# Altium PCB shutter.PcbDoc
Units mm, origin at the board's own origin, x right, y up, seen from the top; angles counter-clockwise.
Board outline 95 x 82 mm, 2 copper layers (Top Layer, Bottom Layer); 49 components, 31 nets, 141 pads, 85 vias.
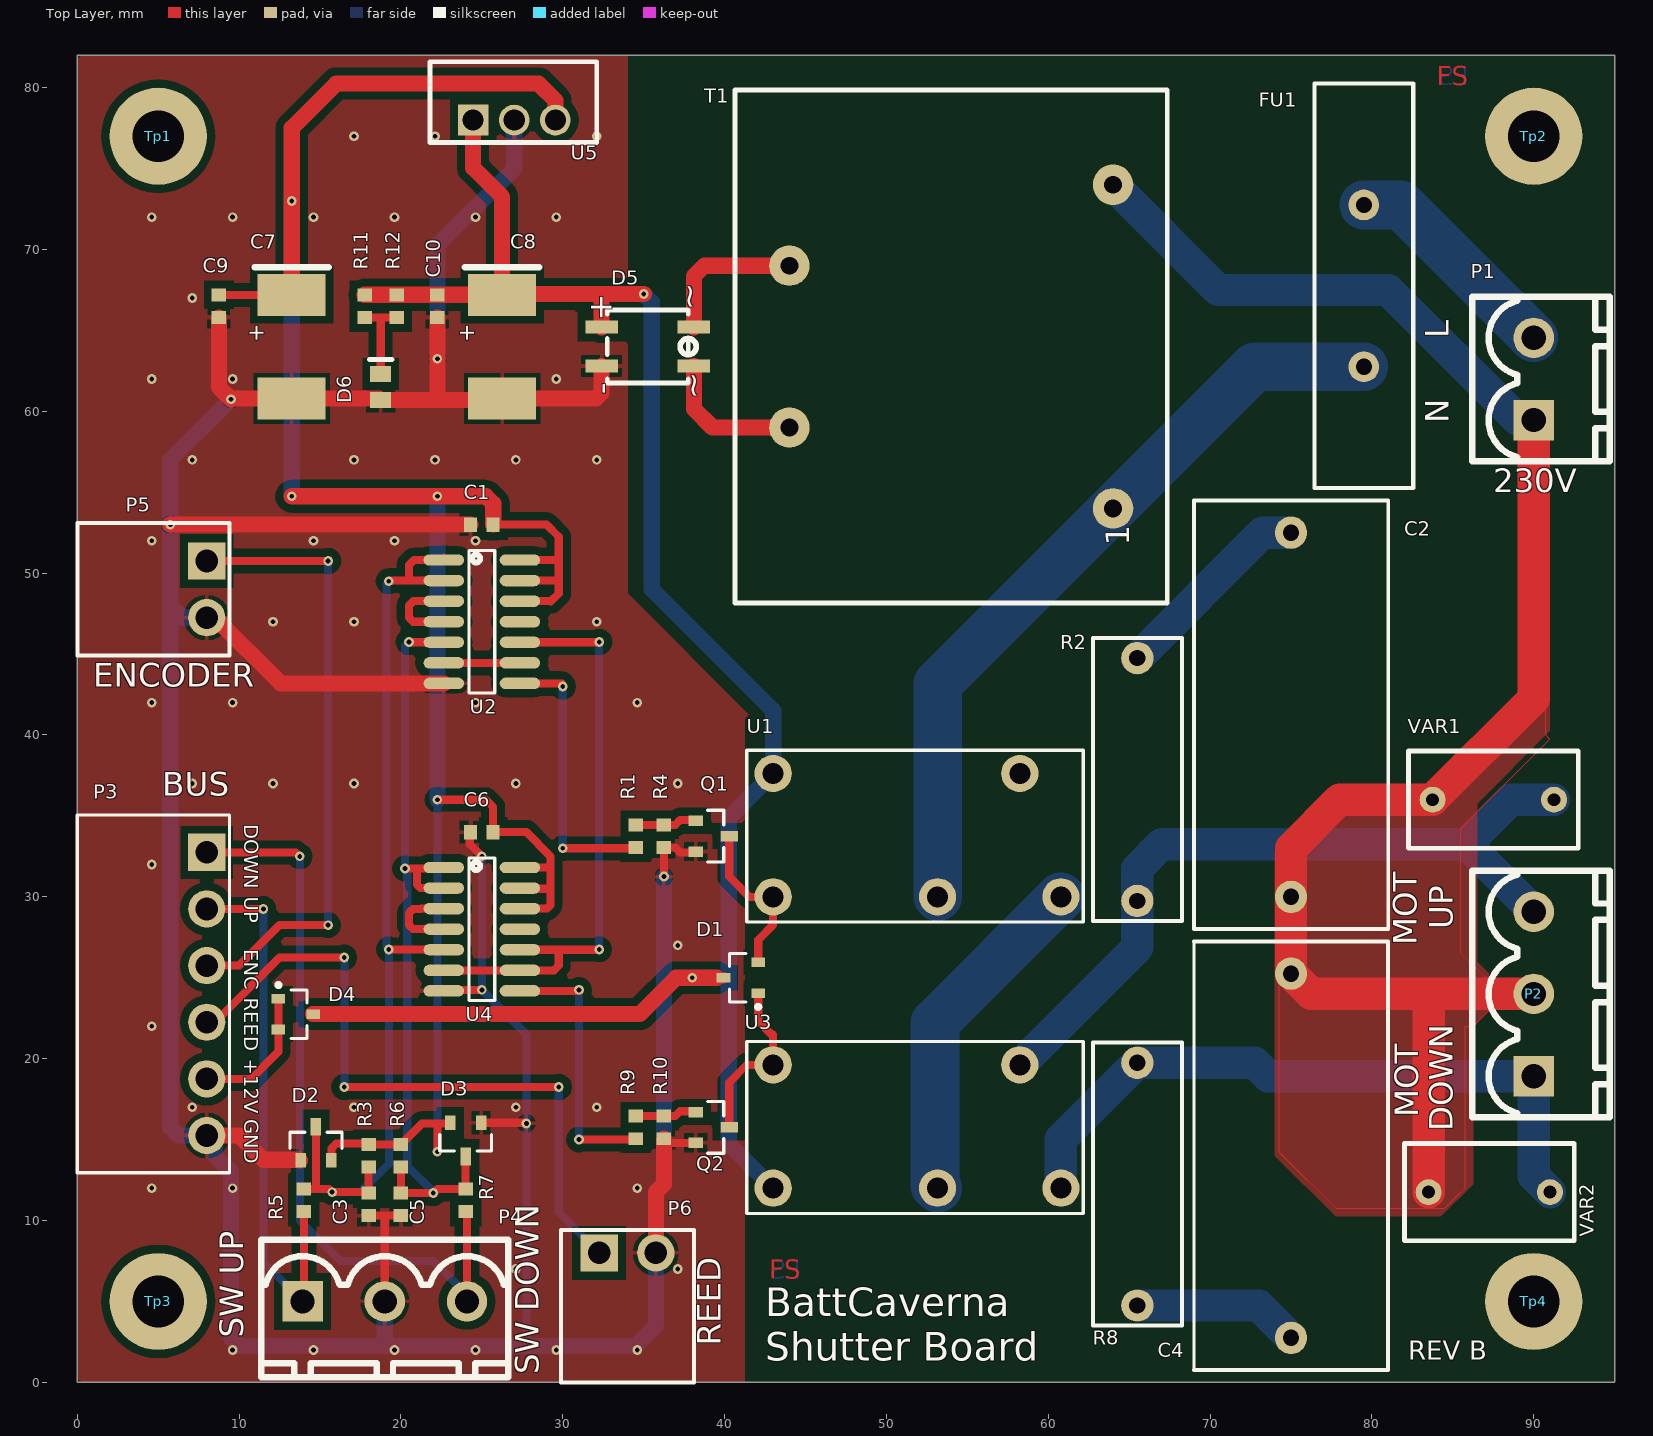
[diagram p0: Top Layer view]
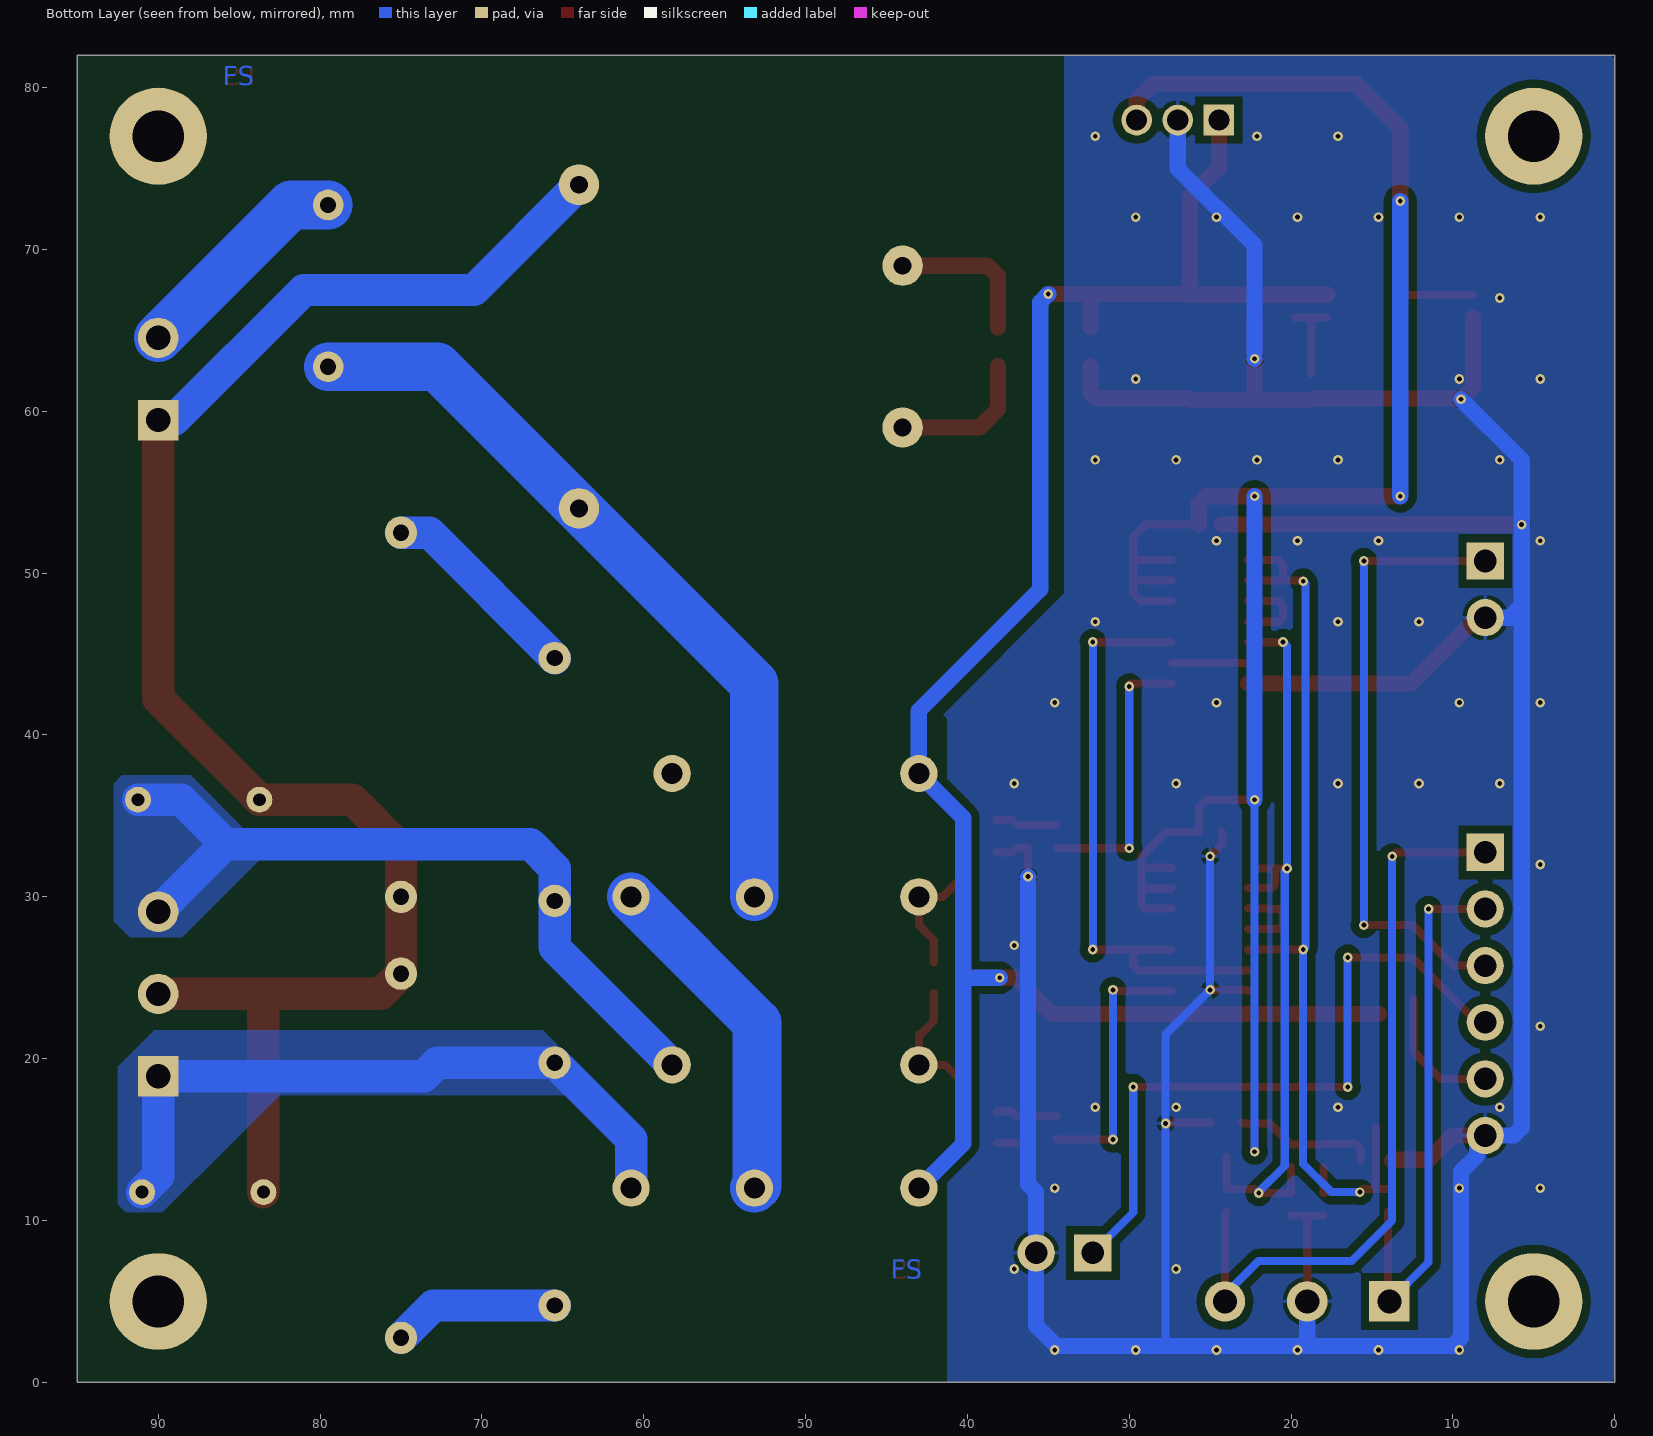
[diagram p1: Bottom Layer view, seen from below]
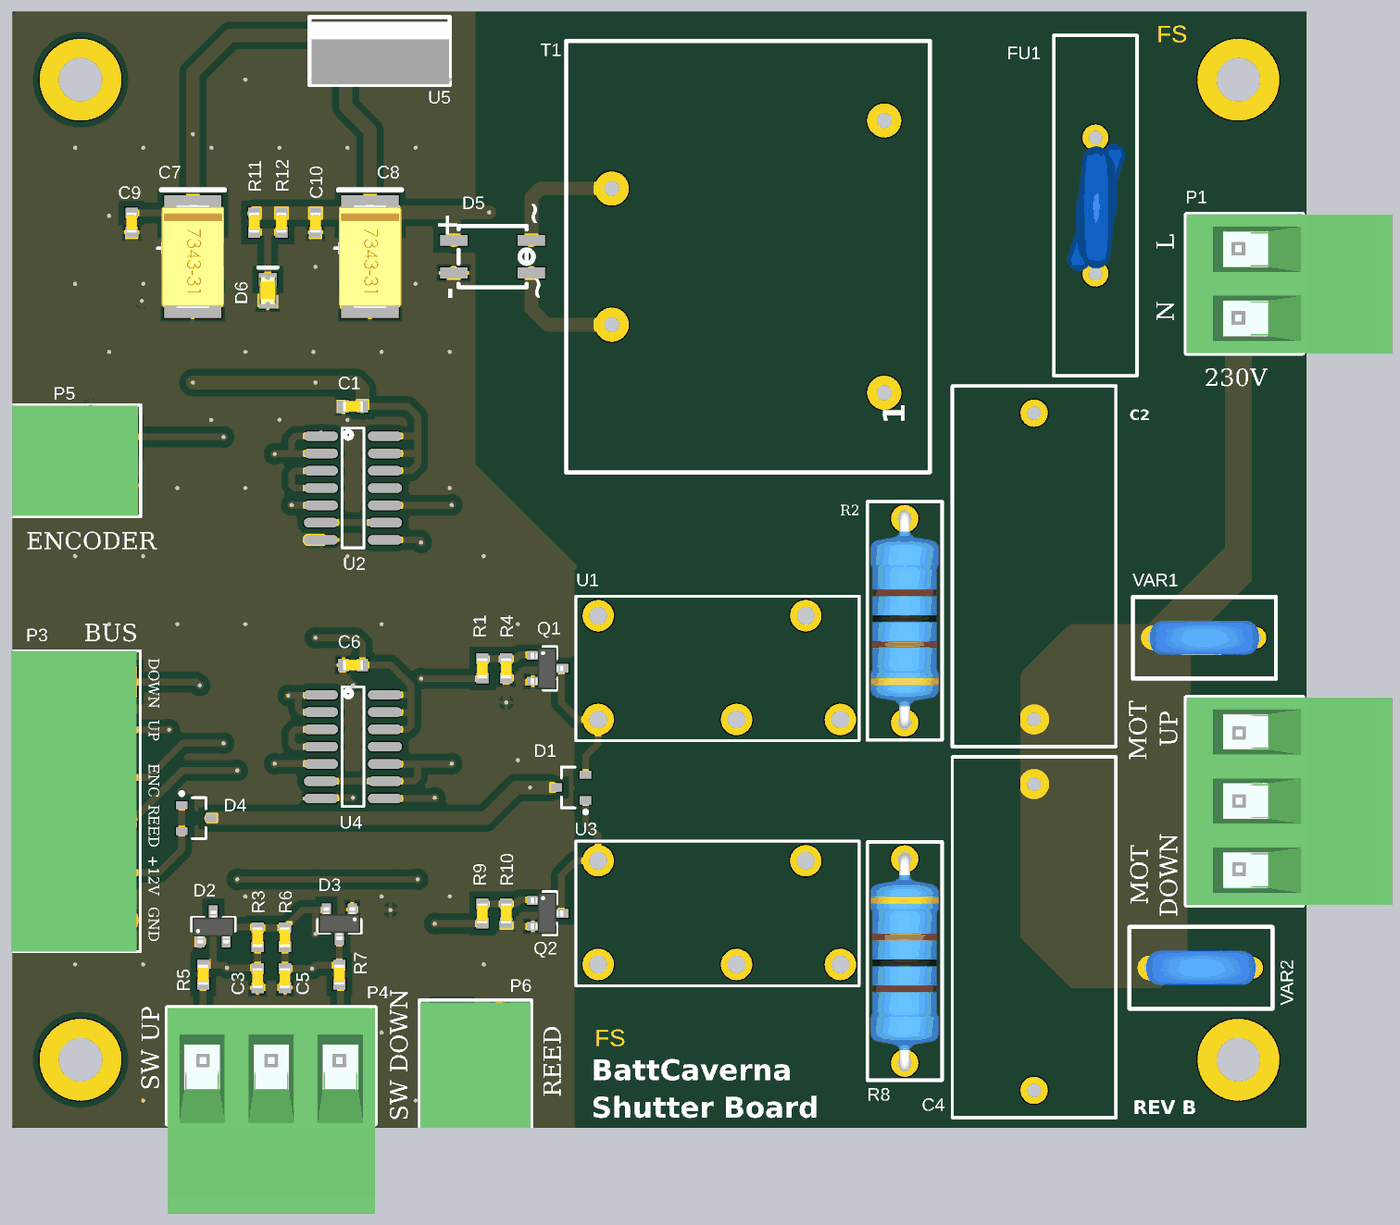
[diagram p2: 3D render of the assembled board from above, using the file's embedded part models]

## Layer stack, top to bottom
Top Solder: solder mask 0.0102, Solder Resist, Dk 3.5
Top Layer: signal copper 0.0356
Dielectric 1: dielectric 0.32, FR-4, Dk 4.8
Bottom Layer: signal copper 0.0356
Bottom Solder: solder mask 0.0102, Solder Resist, Dk 3.5

## Board outline
0,0 95,0 95,82 0,82

## Design rules (kind name [scope] priority, off if disabled: settings)
Clearance [All] p1: gap=0.254 except(0.5: Arc-Poly Track-Poly SMDPad-Poly THPad-Poly Via-Poly Fill-Poly Poly-Poly)
Height [All] p1: minheight=0 maxheight=30 prefheight=12.7
HoleSize [All] p1: absolutevalues=TRUE maxlimit=5 minlimit=0.025 maxpercent=80.000 minpercent=20.000
PolygonConnect PolygonConnect_1 [InNet('NetC2_1')] p1: connectstyle=Direct reliefconductorwidth=0.254 reliefentries=4 polygonreliefangle="90 Angle" airgapwidth=0.254
PolygonConnect PolygonConnect_2 [InNet('MOT_UP')] p2: connectstyle=Direct reliefconductorwidth=0.254 reliefentries=4 polygonreliefangle="90 Angle" airgapwidth=0.254
PolygonConnect PolygonConnect_3 [InNet('MOT_DOWN')] p3: connectstyle=Direct reliefconductorwidth=0.254 reliefentries=4 polygonreliefangle="90 Angle" airgapwidth=0.254
PolygonConnect [All] p4: connectstyle=Relief reliefconductorwidth=0.254 reliefentries=4 polygonreliefangle="90 Angle" airgapwidth=0.254
RoutingVias [All] p1: holewidth=0.711 width=1.27 viastyle="Through Hole" minholewidth=0.711 minwidth=1.27 maxholewidth=0.711 maxwidth=1.27
SilkToSilkClearance [All] p1: silktosilkclearance=0
SilkToSolderMaskClearance [IsPad] p1: minsilkscreentomaskgap=0.12 clearancetoexposedcopper=TRUE
SolderMaskExpansion [All] p1: expansion=0.102
Width [All] p1: maxlimit=5 minlimit=0.254 preferedwidth=0.5 minimp=50.000000 maximp=50.000000 favimp=50.000000
26 further rules are at their usual default settings.

## Components (designator, comment, footprint, x,y, rotation, side; value= is the part's Value field where it differs from the comment)
C1 "100nF" 0603_[1608] 25,53 r0 top
C2 "1.5uF X2 250VAC" RADIAL-22MM 75,41.25 r90 top
C3 "100nF" 0603_[1608] 18,11 r90 top
C4 "1.5uF X2 250VAC" RADIAL-22MM 75,14 r270 top
C5 "100nF" 0603_[1608] 20,11 r90 top
C6 "100nF" 0603_[1608] 25,34 r0 top
C7 "100uF" [7343]_CAP_TAN 13.25,64 r270 top
C8 "100uF" [7343]_CAP_TAN 26.25,64 r270 top
C9 "100nF" 0603_[1608] 8.75,66.5 r90 top
C10 "100nF" 0603_[1608] 22.25,66.5 r90 top
D1 "BAV70" SOT-23_L 41,25 r180 top
D2 "BAV99" SOT-23 14.75,14.75 r90 top
D3 "BAV99" SOT-23 24,15 r270 top
D4 "BAV70" SOT-23_L 13.5,22.75 r0 top
D5 "MBS4" Diode_bridge_smd 35.25,64 r270 top
D6 "PWR_ON" 0805_[2012]_LED 18.75,61.5 r90 top
FU1 "LVR200S" RADIAL-10mm-25x6mm 79.5,67.75 r90 top
P1 "230V" TBLOCK_1X2_5.08MM_THD 90,62 r90 top
P2 "MOTOR" TBLOCK_1X3_5.08MM_THD 90,24 r90 top
P3 "BUS" TBLOCK_1X6_3.5MM_HOR_THD 8,24 r270 top
P4 "SWITCHES" TBLOCK_1X3_5.08MM_THD 19,5 r0 top
P5 "ENCODER" TBLOCK_1X2_3.5MM_HOR_THD 8,49 r270 top
P6 "REED" TBLOCK_1X2_3.5MM_HOR_THD 34,8 r0 top
Q1 "BC817" SOT-23 39.25,33.75 r0 top
Q2 "BC817" SOT-23 39.25,15.75 r0 top
R1 "10K" 0603_[1608] 34.5,33.75 r90 top
R2 "220 1W" "AXIAL 15mm" 65.5,37.25 r270 top
R3 "10K" 0603_[1608] 18,14 r90 top
R4 "4K7" 0603_[1608] 36.25,33.75 r90 top
R5 "330" 0603_[1608] 14,11.25 r270 top
R6 "10K" 0603_[1608] 20,14 r90 top
R7 "330" 0603_[1608] 24,11.25 r270 top
R8 "220 1W" "AXIAL 15mm" 65.5,12.25 r90 top
R9 "10K" 0603_[1608] 34.5,15.75 r90 top
R10 "4K7" 0603_[1608] 36.25,15.75 r90 top
R11 "3K3" 0603_[1608] 17.75,66.5 r90 top
R12 "3K3" 0603_[1608] 19.75,66.5 r90 top
T1 "MYRRA 44122" Transformer_26.7x31.7 54,64 r90 top
Tp1 "" Hole_M3x6mm#1 0,77 r180 top
Tp2 "" Hole_M3x6mm#2 90,77 r180 top
Tp3 "" Hole_M3x6mm#3 3,5 r180 top
Tp4 "" Hole_M3x6mm#2 90,5 r180 top
U1 "G5Q-1 DC12V" RELAYS_SPCO_THD_20x10mirror 43,30 r0 top
U2 "74HC132" SOIC14 25,47 r0 top
U3 "G5Q-1 DC12V" RELAYS_SPCO_THD_20x10mirror 43,12 r0 top
U4 "74HC132" SOIC14 25,28 r0 top
U5 "LM7805-3pin" TO-220_VERTICAL 27,78 r270 top
VAR1 "10D471K" CAP_DISK_7.5MM_THD 87.5,36 r0 top
VAR2 "10D471K" CAP_DISK_7.5MM_THD 87.25,11.75 r0 top

## Footprints (in the part's own frame and the unit in brackets; to place one, negate y for a bottom-side part, rotate by r counter-clockwise, add the part's x,y. Pads: shape width x height; smd on the part's side, far side on the other; paste and mask are expansions set on the pad)
0603_[1608] [mm] "Chip Capacitor, Body 1.6x0.8mm, IPC High Density"
  rect 0.8x0.9 smd: 1(-0.7,0) 2(0.7,0)
  body extent -0.75,-0.4 0.75,0.4, height 0.67
0805_[2012]_LED [mm] "SMD led 0805 size"
  rect 1x1.3 smd: 1(-0.8,0) 2(0.8,0)
  silkscreen extent 1.7,-0.7 1.7,0.7, body extent -1.01,-0.63 1.01,0.62, height 1.1
[7343]_CAP_TAN [mm] "Capacitor, SM Tantalum; Body 7.3 x 4.3 mm (LxW typ)"
  rect 2.6x4.2 smd: 1(-3.2,0) 2(3.2,0)
  silkscreen extent -4.9,-2.3 -4.9,2.3, body extent -3.8,-2.3 3.8,2.3, height 3.1
"AXIAL 15mm" [mm]
  round 2 hole 1: 1(-7.5,0) 2(7.5,0)
  silkscreen extent -8.75,-2.75 8.75,2.75, body extent -8.15,-2.49 7.89,2.49, height 8
CAP_DISK_7.5MM_THD [mm] "Capacitor X/Y class 7.5mm lead spacing, 5mm tickness, radius 16mm"
  round 1.6 hole 0.8: 1(-3.75,0) 2(3.75,0)
  silkscreen extent -5.25,-3 5.25,3, body extent -4,-1.26 4,1.25, height 11
Diode_bridge_smd [mm] "Full diode bridge smd"
  rect 0.8x2 smd: +(-1.2,-2.85) -(1.2,-2.85) AC1(-1.2,2.85) AC2(1.2,2.85)
  silkscreen extent -2.25,-2.5 2.25,3, body extent -2.25,-2.5 2.25,2.5, height 3
Hole_M3x6mm#1 [mm]
  round 6 hole 3.2 paste-10: 1(-5,0)
Hole_M3x6mm#2 [mm]
  round 6 hole 3.2 paste-10: 1(0,0)
Hole_M3x6mm#3 [mm]
  round 6 hole 3.2 paste-10: 1(-2,0)
RADIAL-10mm-25x6mm [mm]
  round 1.9 hole 1: 1(-5,0) 2(5,0)
  silkscreen extent -12.5,-3.05 12.5,3.05, body extent -4.79,-2.19 4.51,2.05, height 11.6
RADIAL-22MM [mm]
  round 2 hole 1: 1(-11.25,0) 2(11.25,0)
  silkscreen extent -13.25,-6 13.25,6, body extent -13.25,-6 13.25,6, height 26
RELAYS_SPCO_THD_20x10mirror [mm]
  round 2.3 hole 1.3: COM(10.16,0) NC(15.24,7.62) NO(17.78,0) T1(0,7.62) T2(0,0)
  silkscreen extent -1.64,-1.56 19.16,9.06, body extent -1.27,-1.27 19.05,8.89, height 16
SOIC14 [mm] "SOIC, 14-Leads, Body 8.7x3.9mm, Pitch 1.27mm, IPC High Density"
  oval 2.5x0.7 smd: 1(-2.35,3.81) 2(-2.35,2.54) 3(-2.35,1.27) 4(-2.35,0) 5(-2.35,-1.27) 6(-2.35,-2.54) 7(-2.35,-3.81) 8(2.35,-3.81) 9(2.35,-2.54) 10(2.35,-1.27) 11(2.35,0) 12(2.35,1.27) 13(2.35,2.54) 14(2.35,3.81)
  silkscreen extent -0.8,-4.4 0.8,4.4, body extent -2,-4.38 2,4.38, height 1.75
SOT-23 [mm] "SOT23, 3-Leads, Body 2.9x1.3mm, Pitch 0.95mm, Lead Span 2.5mm, IPC High Density"
  rect 0.9x0.65 smd: 1(-1.038,0.95) 2(-1.038,-0.95)
  rect 1.1x0.65 smd: 3(1.038,0)
  silkscreen extent -0.3,-1.6 0.7,1.6, body extent -1.2,-1.52 1.2,1.52, height 1.22
SOT-23_L [mm] "SOT23, 3-Leads, Body 2.9x1.3mm, Pitch 0.95mm, Lead Span 2.5mm, IPC High Density"
  rect 0.85x0.6 smd: 1(-1.075,0.95) 2(-1.075,-0.95) 3(1.075,0)
  silkscreen extent -1.2,-1.5 0.7,1.92, body extent -0.7,-1.5 0.7,1.5, height 1.1
TBLOCK_1X2_3.5MM_HOR_THD [mm] "3,50mm - PCB Horizontal - 02p"
  rect 2.3x2.3 hole 1.4: 1(-1.75,0)
  round 2.3 hole 1.4: 2(1.75,0)
  silkscreen extent -4.1,-8 4.1,1.4, body extent -4.05,-8 4.05,1.2, height 7.21
TBLOCK_1X2_5.08MM_THD [mm] "Terminal block 5.08mm 2p"
  rect 2.5x2.5 hole 1.5: 1(-2.54,0)
  round 2.5 hole 1.5: 2(2.54,0)
  silkscreen extent -5.08,-4.69 5.08,3.81, body extent -5.08,-11.28 5.12,3.82, height 18.45
TBLOCK_1X3_5.08MM_THD [mm] "Terminal block 5.08mm 3p"
  rect 2.5x2.5 hole 1.5: 1(-5.08,0)
  round 2.5 hole 1.5: 2(0,0) 3(5.08,0)
  silkscreen extent -7.62,-4.69 7.62,3.81, body extent -7.62,-11.28 7.62,3.82, height 18.45
TBLOCK_1X6_3.5MM_HOR_THD [mm] "3,50mm - PCB Horizontal - 06p"
  rect 2.3x2.3 hole 1.4: 1(-8.75,0)
  round 2.3 hole 1.4: 2(-5.25,0) 3(-1.75,0) 4(1.75,0) 5(5.25,0) 6(8.75,0)
  silkscreen extent -11.05,-8 11.05,1.4, body extent -11.05,-8.1 11.05,1.1, height 7.21
TO-220_VERTICAL [mm]
  rect 1.9x1.9 hole 1.3: 1(0,-2.54)
  round 1.9 hole 1.3: 2(0,0) 3(0,2.54)
  silkscreen extent -3.6,-5.2 1.4,5.1, body extent -3.25,-5.08 1.32,5.08, height 19.54
Transformer_26.7x31.7 [mm]
  round 2.5 hole 1.1: 1(-10,-10) 5(10,-10) 7(5,10) 9(-5,10)
  silkscreen extent -15.85,-13.35 15.85,13.35, body extent -15.87,-13.37 15.83,13.33, height 26.8

## Part data
C1 C2 C4 C6 C9 C10: library part Cap, "Ceramic X7R 50V"
C3 C5: library part Cap, "Ceramic X5R 6.3V, 10V"
C7 C8: library part "Cap Pol1", "Tantalum 25V T491X107K025AT"
D1 D2 D3 D4: "SOT23"
D5: library part Diode_bridge2
D6: library part LED, "Multicolor LED"
FU1: library part FuseAutoReset, "Fuse autoreset"
P1 P5 P6: library part "Header 2", "Header, 2-Pin"
P2 P4: library part "Header 3", "Header, 3-Pin"
P3: library part "Header 6", "Header, 6-Pin"
Q1 Q2: "NPN Transistor"
R1 R2 R3 R4 R5 R6 R7 R8 R9 R10 R11 R12: library part Res1, "Resistor"
T1: library part transformer_myrra_44087
Tp1 Tp2 Tp3 Tp4: library part Test_point
U1 U3: library part "Relay SPCO"
U2 U4: library part 74HC00, "4 NAND ports"
VAR1 VAR2: library part VARISTOR

## Via types
v1: diameter 0.6, hole 0.3, Top Layer to Bottom Layer, tented both sides, 85 vias

## Nets (pads, with @x,y where several pads share a name; then routed paths per layer and width w, separated by ;. In a path a pad name is that pad's centre, name@x,y a point inside that pad or via, vN(x,y) a via of type N, cw(c..) or ccw(c..) an arc to the next point about the centre after c; other vN are vias at no path point)
+12V: C8.1 C10.2 D1.3 D4.3 D5.+ R11.2 R12.2 U1.T1 U3.T2 U5.1 | length 120.3
  Top Layer w0.7: D1.3@39.5,25 D1.3
  Top Layer w1: D4.3 34.75,22.75 37,25 v1(38,25) D1.3@39.5,25 ; R11.2 C10.2 C8.1 C8.1@26.25,67.25 ; U5.1 24.46,75.04 26.25,73.25 C8.1@26.25,67.25 ; D5.+ 32.4,67.15 32.5,67.25 ; v1(35,67.25) 32.5,67.25 ; C8.1@26.25,67.25 32.5,67.25
  Bottom Layer w1: v1(35,67.25) 35.5,66.75 35.5,49 43,41.5 U1.T1 40.25,34.87 40.25,25 ; v1(38,25) 40.25,25 ; U3.T2 40.25,14.75 40.25,25
DIR: R9.1 U4.8 | length 16.5
  Top Layer w0.5: U4.8 30.94,24.19 v1(31,24.25) v1@31.06,24.19 ; v1(31,15) 34.45,15 R9.1
  Bottom Layer w0.5: v1(31,15) v1(31,24.25)
GND: C1.1 C3.1 C5.1 C6.1 C7.2 C8.2 C9.1 C10.1 D2.1 D3.1 D5.- D6.1 P3.6 P4.2 P5.2 P6.2 Q1.2 Q2.2 R4.1 R10.1 U2.7 U4.7 U5.2 | length 274.4
  Top Layer w0.5: C3.1 19,10.3 ; P4.2 19,10.3 ; C5.1 19,10.3 ; U4.7 22.71,24.25 v1(25,24.25) ; C6.1 24.25,33.95 24.25,33.25 v1(25,32.5) ; D3.1 27.712,16.038 v1(27.75,16) ; R10.1 36.5,14.8 Q2.2 ; v1(36.25,31.25) R4.1 36.95,33.05 37.25,32.75 38.162,32.75 Q1.2
  Top Layer w1: v1(5.75,53) C1.1 ; P3.6@8.5,15.25 10,15.25 11.5,13.75 13.708,13.75 D2.1@13.746,13.712 ; P5.2@8.5,47.25 12.56,43.19 U2.7 ; C9.1 8.75,61.5 v1(9.5,60.75) 9.55,60.8 C7.2 18.65,60.8 D6.1 22.25,60.7 ; C10.1 22.25,60.7 ; D5.- 32.4,61.15 32.05,60.8 C8.2 26.15,60.7 22.25,60.7 ; P6.2 35.75,11.75 36.25,12.25 R10.1
  Bottom Layer w0.5: v1(25,32.5) v1(25,24.25) 27.75,21.5 v1(27.75,16) 27.75,2.25
  Bottom Layer w1: P5.2@8.5,47.25 6.5,47.25 5.75,48 ; v1(9.5,60.75) 5.75,57 v1(5.75,53) 5.75,48 ; P4.2 19,2.25 ; v1(22.25,63.25) 22.25,70.25 27,75 U5.2 ; v1(36.25,31.25) 36.25,12.25 35.75,11.75 P6.2 35.75,3.5 34.5,2.25 27.75,2.25 19,2.25 ; 5.75,48 5.75,15.75 6.25,15.25 8.5,15.25 8.5,14 9.5,13 9.5,2.75 10,2.25 19,2.25
  other v1: 9.6,2 14.6,2 19.6,2 24.6,2 29.6,2 34.6,2 27.1,7 37.1,7 4.6,12 9.6,12 34.6,12 7.1,17 17.1,17 27.1,17 32.1,17 4.6,22 37.1,27 4.6,32 7.1,37 12.1,37 17.1,37 27.1,37 37.1,37 4.6,42 9.6,42 24.6,42 34.6,42 12.1,47 17.1,47 32.1,47 4.6,52 14.6,52 19.6,52 24.6,52 7.1,57 17.1,57 22.1,57 27.1,57 32.1,57 4.6,62 9.6,62 29.6,62 7.1,67 4.6,72 9.6,72 14.6,72 19.6,72 24.6,72 29.6,72 17.1,77 22.1,77 32.1,77
MOT_DOWN: P2.1 R8.2 U3.NO VAR2.2 | length 42.1
  Bottom Layer w2: U3.NO 60.78,15.03 R8.2 72.75,19.75 73.58,18.92 P2.1 90,12.75 VAR2.2
MOT_UP: P2.3 R2.2 U3.NC VAR1.2 | length 48.5
  Bottom Layer w2: U3.NC 65.5,26.88 R2.2 65.5,31.75 67,33.25 85.83,33.25 ; P2.3 85.83,33.25 ; VAR1.2 88.58,36 85.83,33.25
NetC2_1: C2.1 C4.1 P1.1 P2.2 T1.5 VAR1.1 VAR2.1 | length 103.6
  Top Layer w2: VAR2.1 83.5,24 ; P2.2 83.5,24 ; P1.1 90,42.25 VAR1.1 78,36 75,33 C2.1 C4.1 76.25,24 83.5,24
  Bottom Layer w2: T1.5 70.5,67.5 81,67.5 89.04,59.46 P1.1
NetC2_2: C2.2 R2.1 | length 12.7
  Bottom Layer w2: R2.1 73.25,52.5 C2.2
NetC3_2: C3.2 D2.3 R3.1 R5.1 U2.1 U2.2 U4.5 | length 60.2
  Top Layer w0.254: U2.1 U2.1@22.65,51.1
  Top Layer w0.5: R5.1 14.75,11.95 ; D2.3 14.75,11.95 ; R3.1 C3.2 17.95,11.75 v1(15.75,11.75) 15.55,11.95 14.75,11.95 ; v1(19.25,26.75) 22.63,26.75 U4.5 ; v1(19.25,49.5) 19.29,49.54 20.5,49.54 ; U2.2 20.5,49.54 ; U2.1 20.81,50.81 20.5,50.5 20.5,49.54
  Bottom Layer w0.5: v1(15.75,11.75) 17.5,11.75 19.25,13.5 v1(19.25,26.75) 19.111,26.889 19.111,49.361 v1(19.25,49.5)
NetC4_2: C4.2 R8.1 | length 10.3
  Bottom Layer w2: R8.1 73,4.75 C4.2
NetC5_2: C5.2 D3.3 R6.1 R7.1 U2.5 U4.1 U4.2 | length 49.4
  Top Layer w0.5: R6.1 C5.2 v1(22,11.7) 22.25,11.95 R7.1 D3.3 ; v1(20.25,31.75) 21,31.75 ; v1(20.5,45.75) 20.52,45.73 U2.5 ; U4.1@22.15,31.75 21,31.75 ; U4.2 21.21,30.54 21,30.75 21,31.75
  Bottom Layer w0.5: v1(20.5,45.75) 20.25,45.5 v1(20.25,31.75) 20.389,31.611 20.389,13.361 22,11.75 v1(22,11.7)
NetD1_1: D1.1 Q2.3 U3.T1 | length 10.8
  Top Layer w0.5: Q2.3 40.288,18.538 41.37,19.62 U3.T1 43,21.5 42.9,21.5 42.075,22.325 D1.1
NetD1_2: D1.2 Q1.3 U1.T2 | length 10.2
  Top Layer w0.5: Q1.3 40.288,31.25 41.537,30 U1.T2 43,28.25 42.075,27.325 D1.2
NetD4_1: D4.1 D4.2 P3.5 | length 7.9
  Top Layer w0.5: P3.5@8.5,18.75 10.75,18.75 12.25,20.25 12.425,20.425 D4.2 D4.1
NetD5_AC1: D5.AC1 T1.7 | length 9.3
  Top Layer w1: D5.AC1 38.1,68.35 38.75,69 T1.7
NetD5_AC2: D5.AC2 T1.9 | length 9
  Top Layer w1: D5.AC2 38.1,60.15 39.25,59 T1.9
NetD6_2: D6.2 R11.1 R12.1 | length 5.5
  Top Layer w0.5: R11.1 18.75,65.8 ; D6.2 18.75,65.8 ; R12.1 18.75,65.8
NetFU1_1: FU1.1 T1.1 U1.COM | length 47.6
  Bottom Layer w3: U1.COM 53.16,43.16 T1.1 72.75,62.75 FU1.1
NetFU1_2: FU1.2 P1.2 | length 13.9
  Bottom Layer w3: FU1.2 81.79,72.75 P1.2
NetP3_1: P3.1 P4.3 R7.2 | length 46.1
  Top Layer w0.5: P3.1@8.5,32.75 13.5,32.75 v1(13.75,32.5) ; R7.2 24.08,10.47 P4.3
  Bottom Layer w0.5: v1(13.75,32.5) 13.75,10 16.25,7.5 22,7.5 24.08,5.42 P4.3
NetP3_2: P3.2 P4.1 R5.2 | length 33.9
  Top Layer w0.5: P3.2@8.5,29.25 v1(11.5,29.25) ; P4.1 14,5.08 R5.2
  Bottom Layer w0.5: v1(11.5,29.25) 11.5,7.42 P4.1 P4.1@14,5.08
NetP3_3: P3.3 P5.1 | length 37.5
  Top Layer w0.5: P3.3@8.5,25.75 10,25.75 12.5,28.25 v1(15.5,28.25) ; P5.1@8.5,50.75 v1(15.5,50.75)
  Bottom Layer w0.5: v1(15.5,28.25) v1(15.5,50.75)
NetP3_4: P3.4 P6.1 | length 42.2
  Top Layer w0.5: P3.4@8.5,22.25 12.5,26.25 v1(16.5,26.25) ; v1(16.5,18.25) v1(29.75,18.25)
  Bottom Layer w0.5: v1(16.5,18.25) v1(16.5,26.25) ; v1(29.75,18.25) 29.75,10.5 P6.1
NetQ1_1: Q1.1 R1.2 R4.2 | length 3.9
  Top Layer w0.5: R1.2 R4.2 36.95,34.45 37.25,34.75 38.163,34.75 Q1.1
NetQ2_1: Q2.1 R9.2 R10.2 | length 3.9
  Top Layer w0.5: R9.2 R10.2 36.95,16.45 37.25,16.75 38.162,16.75 Q2.1
NetU1_NO: U1.NO U3.COM | length 21.3
  Bottom Layer w3: U3.COM 53,12.16 53,22.22 U1.NO
NetU2_3: U2.3 U2.4 | length 5.3
  Top Layer w0.5: U2.4 20.75,47 20.5,47.25 20.5,48 20.77,48.27 U2.3
NetU2_6: U2.6 U2.9 | length 4.7
  Top Layer w0.5: U2.6 U2.9
NetU2_10: U2.10 U4.6 U4.9 U4.10 | length 37
  Top Layer w0.5: U4.6 U4.9 29.46,25.46 29.75,25.75 29.75,26.73 ; U4.10 32.23,26.73 v1(32.25,26.75) ; U2.10 32.23,45.73 v1(32.25,45.75)
  Bottom Layer w0.5: v1(32.25,26.75) v1(32.25,45.75)
NetU4_3: U4.3 U4.4 | length 5.3
  Top Layer w0.5: U4.4 20.75,28 20.5,28.25 20.5,29 20.75,29.25 21.25,29.25 21.27,29.27 U4.3
PWR: R1.1 U2.8 | length 17.4
  Top Layer w0.5: U2.8 v1@29.81,43.19 ; v1@29.94,43.19 v1@29.81,43.19 ; v1(30,33) 34.45,33 R1.1 ; v1(30,43) v1@29.81,43.19
  Bottom Layer w0.5: v1(30,33) v1(30,43)
VCC: C1.2 C6.2 C7.1 C9.2 D2.2 D3.2 R3.2 R6.2 U2.12 U2.13 U2.14 U4.12 U4.13 U4.14 U5.3 | length 150.7
  Top Layer w0.5: C9.2 C7.1 ; D2.2 15.7,14.45 16,14.75 17.95,14.75 R3.2 R6.2 21.3,16 22.25,16 ; v1(22.25,14.25) 22.25,16 ; v1(22.25,36) 25.25,36 25.7,35.55 C6.2 27.75,34 29.25,32.5 29.25,31.75 ; D3.2 23.012,16 22.25,16 ; C1.2 29,53 29.75,52.25 29.75,50.875 ; U4.12 29.02,29.27 29.25,29.5 29.25,30.5 ; U4.13 27.39,30.5 29.25,30.5 ; U2.12 29.23,48.27 29.25,48.25 29.75,48.75 29.75,49.5 ; U2.13 29.71,49.54 29.75,49.5 ; U2.14 29.685,50.81 29.75,50.875 ; U4.14@27.41,31.75 U4.14 29.19,31.81 29.25,31.75 ; 29.25,30.5 29.25,31.75 ; 29.75,49.5 29.75,50.875
  Top Layer w1: v1(13.25,54.75) v1(22.25,54.75) 25.25,54.75 25.7,54.3 C1.2 ; C7.1 v1(13.25,73) 13.25,77.5 16,80.25 28.5,80.25 29.54,79.21 U5.3
  Bottom Layer w0.5: v1(22.25,14.25) v1(22.25,36)
  Bottom Layer w1: v1(13.25,54.75) v1(13.25,73) ; v1(22.25,36) v1(22.25,54.75)
pads on no net: Tp1.1 Tp2.1 Tp3.1 Tp4.1 U1.NC U2.11 U4.11

## Polygon pours and split planes (outlines as drawn)
MOT_DOWN on Bottom Layer "Top Layer-NetC4_2" (solid, remove dead copper, pour order 16): 64.75,17.75 82.5,17.75 85.5,14.75 89.75,10.5 91,10.5 92,10.5 92.5,11 92.5,11.5 92.5,12.5 92.5,19.5 90.75,21.25 90.25,21.75 66.75,21.75 66.25,21.75 63.75,19.25
MOT_UP on Bottom Layer "Top Layer-NetC4_2" (solid, remove dead copper, pour order 14): 84.75,34.25 88,37.5 92.25,37.5 92.75,37 92.75,29 92.75,28.5 91.75,27.5 88.5,27.5 83.75,32.25 83.75,32.5
GND on Bottom Layer "Top Layer-NetC4_2" (solid, remove dead copper, pour order 7): 0,82 34,82 34,48.75 41.5,41.25 41.25,41 41.25,0 0.25,0 0,0.25
NetC2_1 on Top Layer "Top Layer-NetC4_2" (solid, remove dead copper, pour order 6): 89,42.5 83.5,37 83.25,36.75 77.75,36.75 77.75,36.5 74.25,33 74,32.75 74,27 74,14 77.75,10.25 84,10.25 84.25,10.25 86.25,12.25 86.25,21.5 86.25,22 87.25,23 87.25,25 87.25,25.25 86.5,26 86.5,35.5 86.5,35.75 91,40.25 91,43
no net on Top Layer "Top Layer-NetC4_2" (solid, remove dead copper, pour order 4): 89,42.5 83.5,37 83.5,36.75 77.5,36.75 74.25,33.5 74.25,33 74.25,14.25 77.75,10.75 84.25,10.75 84.5,10.75 85.25,11.5 85.75,12 85.75,22 86.25,22 87.25,23 87.25,25 87,25 85.75,26.25 85.5,26.5 85.5,33.75 85.5,34.25 91,39.75 90.75,40 90.75,42.5
GND on Top Layer "Top Layer-NetC4_2" (solid, remove dead copper, pour order 5): 0,82 34,82 34,48.75 41.5,41.25 41.25,41 41.25,0 0.25,0 0,0.25

## Other copper
Top Layer:
  text "FS" at 84,79.75 h2
  text "FS" at 42.75,6 h2
Bottom Layer:
  text "FS" at 86,79.75 h2
  text "FS" at 44.75,6 h2

## Silkscreen, mask and mechanical layers (free items; w line width, h text height)
Top Overlay:
  text "L" at 85.25,64.5 h2.5 r90
  text "N" at 85.25,59.25 h2.5 r90
  text "230V" at 87.5,54.5 h2.5
  text "ENCODER" at 1,42.5 h2.5
  text "BUS" at 5.25,35.75 h2.5
  text "DOWN" at 10,34.5 h1.5 r270
  text "UP" at 10,30 h1.5 r270
  text "UP" at 85.5,28 h2.5 r90
  text "MOT" at 83.25,27 h2.5 r90
  text "ENC" at 10,26.75 h1.5 r270
  text "REED" at 10,23.75 h1.5 r270
  text "+12V" at 10,20 h1.5 r270
  text "MOT" at 83.341,16.377 h2.5 r90
  text "GND" at 10,16.25 h1.5 r270
  text "DOWN" at 85.5,15.5 h2.5 r90
  text "BattCaverna" at 42.5,3.5 h3
  text "SW UP" at 10.75,2.75 h2.5 r90
  text "REED" at 40.25,2.25 h2.5 r90
  text "REV B" at 82.25,1 h2
  text "Shutter Board" at 42.5,0.75 h3
  text "SW DOWN" at 29,0.5 h2.5 r90
Top Solder:
  text "FS" at 84,79.75 h2
  text "FS" at 42.75,6 h2
Bottom Solder:
  text "FS" at 86,79.75 h2
  text "FS" at 44.75,6 h2
Mechanical 1:
  the board outline again, w0.2

## Text inside footprints (layer, text, board x,y; h text height)
C7: Mechanical 3 "+" at 14.75,68.4 h1 r270; Mechanical 5 "+" at 12.75,68.65 h1 r270; Mechanical 5 "+" at 13.45,68.65 h1 r270; Top Overlay "+" at 10.65,65.4 h1 r270
C8: Mechanical 3 "+" at 27.75,68.4 h1 r270; Mechanical 5 "+" at 25.75,68.65 h1 r270; Mechanical 5 "+" at 26.45,68.65 h1 r270; Top Overlay "+" at 23.65,65.4 h1 r270
D5: Mechanical 3 "+" at 31.25,67.25 h2.5 r270; Mechanical 3 "-" at 31.5,61.75 h2.5 r270; Top Overlay "~" at 39,66.25 h2.5 r90; Top Overlay "~" at 39.25,60.75 h2.5 r90; Top Overlay "+" at 31.25,67.25 h2.5 r270; Top Overlay "-" at 31.5,61.75 h2.5 r270
D6: Mechanical 3 "K" at 18.65,62.575 h0.8 r90
P1: Mechanical 3 "1" at 94.064,57.428 h2 r90
T1: Top Overlay "1" at 65.5,51.7 h2.5 r90
U2: Mechanical 3 "1" at 22.5,50.5 h1
U4: Mechanical 3 "1" at 22.5,31.5 h1